# Altium PCB PCB2.PcbDoc (part 2 of 2)
Units mm, origin at the board's own origin, x right, y up, seen from the top; angles counter-clockwise.
Board outline 100 x 150 mm, 2 copper layers (Top Layer, Bottom Layer), stack 1.569 mm thick; 187 components, 138 nets, 678 pads, 337 vias.
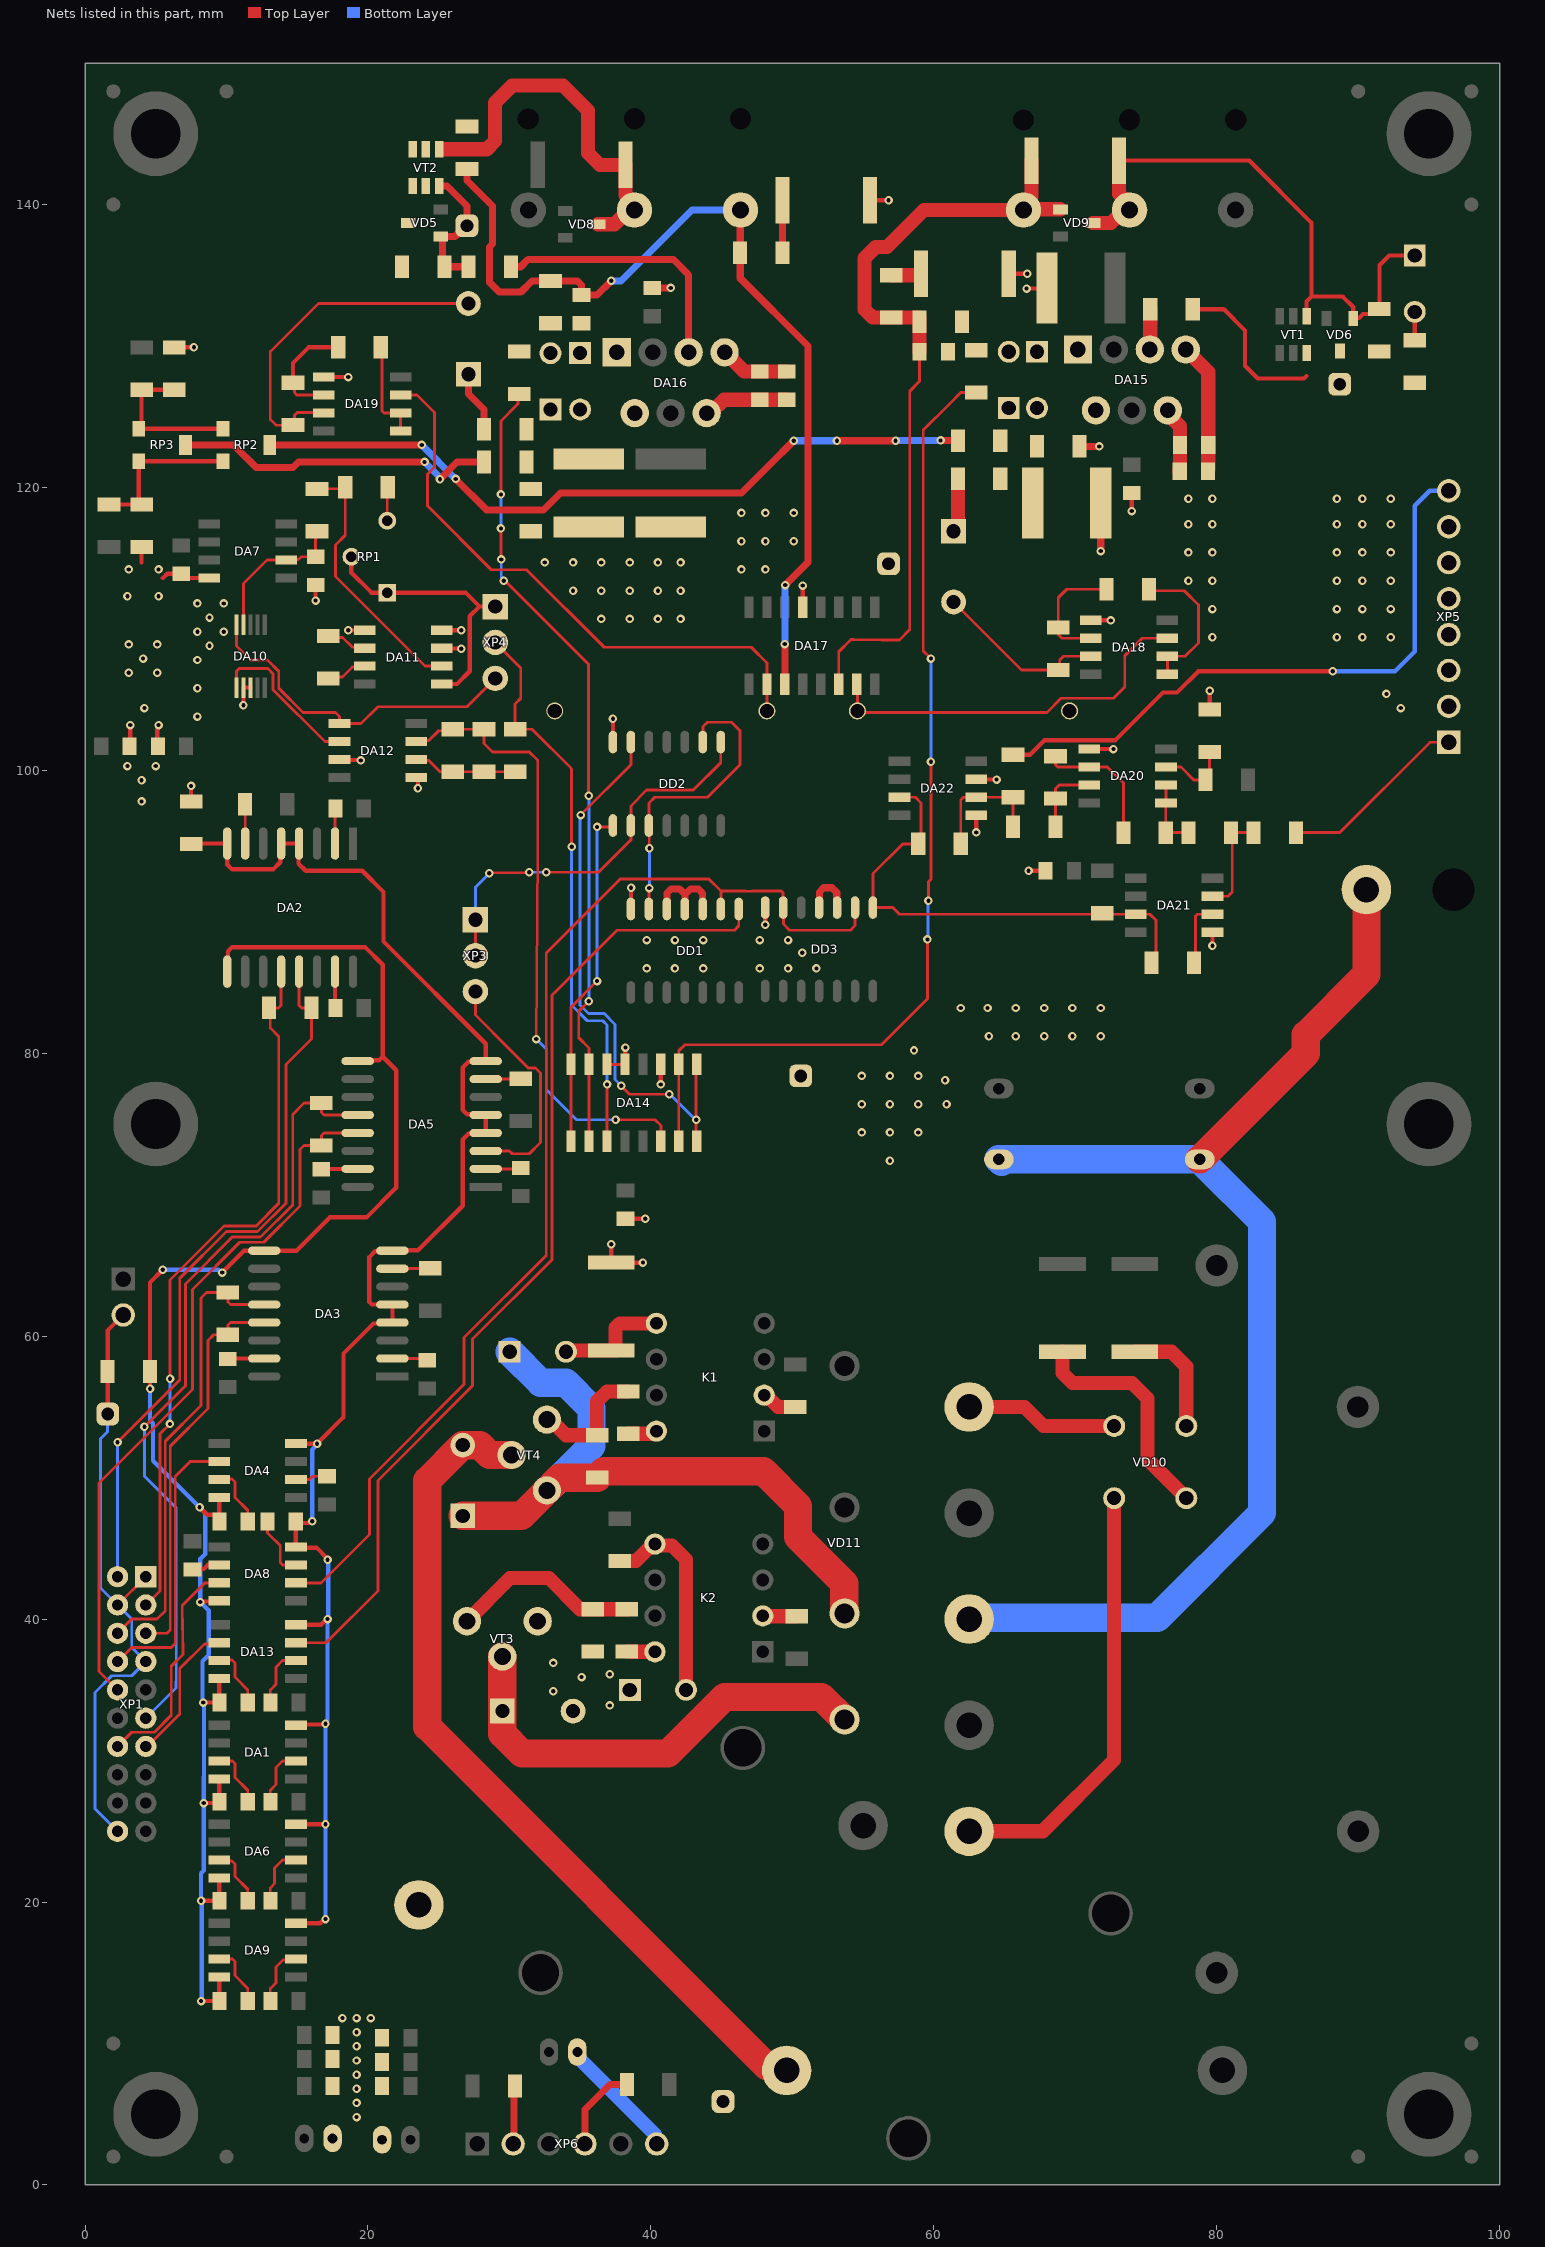
[diagram p2: the nets of this part, all layers, seen from the top]

## Via types
v1: diameter 0.6, hole 0.3, Top Layer to Bottom Layer, 337 vias

## Nets (pads, with @x,y where several pads share a name; then routed paths per layer and width w, separated by ;. In a path a pad name is that pad's centre, name@x,y a point inside that pad or via, vN(x,y) a via of type N, cw(c..) or ccw(c..) an arc to the next point about the centre after c; other vN are vias at no path point) (continued)
GND: C13.2 C16.1 C22.1 C23.1 C26.1 C29.2 C30.1 C31.2 C34.1 C35.1 C38.2 C39.2 C40.1 C41.1 C42.2 C43.2 C44.2 C45.1 C46.2 C47.1 C48.1 C49.2 C50.1 C51.2 C54.2 DA7.4 DA10.2 DA10.3 DA11.3 DA11.4 DA11.5 DA12.3 DA12.5 DA14.3 DA14.5 DA14.6 DA17.5 DA18.5 DA19.5 DA20.5 DA21.1 DA22.1 DA22.3 DD1.7 DD2.7 DD3.7 pad.4 pad.10 R8.2 R15.1 R16.2 R20.1 R23.1 R41.2 R42.2 R49.1 R59.1 XP5.2 XP5.3 XP5.4 XP5.5 XP5.6 XP5.7 XP6.6 КТ2.1 КТ5.1 КТ6.1 | length 154.2
  Top Layer w0.2: DA14.6@36.895,79.212 DA14.5@38.165,79.212
  Top Layer w0.3: C44.2@3.15,101.7 3.2,101.75 v1(3.2,103.2) ; 4,114.7 R16.2@4,115.8 ; C43.2@5.1,101.7 5.1,103.019 5.2,103.119 v1(5.2,103.2) ; 5.5,113.6 5.514,113.6 5.814,113.9 C13.2@6.8,113.9 7.105,113.595 DA7.4@8.788,113.595 ; R15.1@6.3,129.9 v1(7.7,129.9) ; R8.2@7.5,97.8 v1(7.5,98.9) ; v1(11.2,104.6) DA10.2@11.2,105.85 DA10.3@11.7,105.85 ; v1(16.3,112) C16.1@16.3,113.1 ; DA19.5@16.888,127.805 16.89,127.803 18.598,127.803 v1(18.6,127.8) ; DA12.3@17.988,100.765 18.02,100.732 19.467,100.732 v1(19.5,100.7) ; v1(18.6,109.9) 18.603,109.903 19.785,109.903 DA11.5@19.788,109.905 ; DA12.5@23.412,99.495 23.537,99.32 v1(23.537,98.737) ; DA11.3@25.212,108.635 25.229,108.617 26.583,108.617 v1(26.6,108.6) ; DA11.4@25.212,109.905 25.214,109.903 26.598,109.903 v1(26.6,109.9) ; R59.1@37.2,65.2 39.443,65.2 v1(39.443,65.203) ; R59.1@37.2,65.275 v1(37.2,66.498) ; DD2.7@37.32,102 v1(37.32,103.65) ; DA14.5@38.165,79.212 38.183,79.23 38.183,80.383 v1(38.2,80.4) ; C48.1@38.2,68.3 v1(39.6,68.3) ; DD1.7@38.59,90.2 38.595,90.205 38.595,91.695 v1(38.6,91.7) ; v1(40.7,77.8) 40.703,77.803 40.703,79.21 DA14.3@40.705,79.212 ; v1(48.08,89.077) DD3.7@48.08,90.3 ; v1(50.73,113.058) 50.735,113.053 50.735,111.529 DA17.5@50.74,111.524 ; R42.2@55.575,140.3 v1(56.798,140.3) ; v1(63,95.607) DA22.1@63,96.83 ; DA22.3@63,99.37 63.012,99.358 64.422,99.358 v1(64.434,99.345) ; R41.2@65.375,135.1 v1(66.598,135.1) ; v1(66.557,134.056) 67.956,134.056 C30.1@68,134.1 ; v1(66.7,92.9) C54.2@67.85,92.9 ; DA20.5@70.988,101.505 70.991,101.502 72.698,101.502 v1(72.7,101.5) ; DA18.5@71.088,110.605 71.091,110.602 72.498,110.602 v1(72.5,110.6) ; v1(74,118.327) C31.2@74,119.55 ; R49.1@79.5,104.4 v1(79.5,105.623) ; v1(79.7,87.6) DA21.1@79.7,88.56
  Top Layer w0.5: C26.1@40,134.1 C26.1@40.1,134.1 v1(41.4,134.1) ; R20.1@70.3,122.9 v1(71.7,122.9) ; v1(71.8,115.5) C22.1@71.8,118.9
  Top Layer w2: C41.1@78.8,72.5 86.3,80 86.3,81.3 90.585,85.585 pad.4@90.585,91.568
  Bottom Layer w1: C39.2@34.8,9.4 34.8,9.075 40.296,3.579 40.296,3.024 XP6.6@40.42,2.9
  Bottom Layer w2: pad.10@62.5,40 62.6,40.1 75.8,40.1 83.2,47.5 83.2,68.1 79.227,72.073 79.227,72.315 79.042,72.5 C41.1@78.8,72.5 C42.2@64.615,72.5 ; C42.2@64.6,72.5 C42.2@64.615,72.5 ; C42.2@64.8,72.315 C42.2@64.615,72.5
  other v1: 19.2,4.8 19.2,5.8 19.2,6.8 19.2,7.8 19.2,8.8 19.2,9.8 19.2,10.8 18.2,11.8 19.2,11.8 20.2,11.8 56.9,72.4 54.9,74.4 56.9,74.4 58.9,74.4 54.9,76.4 56.9,76.4 58.9,76.4 60.9,76.4 60.8,78.1 54.9,78.4 56.9,78.4 58.9,78.4 58.6,80.2 63.9,81.2 65.8,81.2 67.8,81.2 69.8,81.2 71.8,81.2 61.9,83.2 63.8,83.2 65.8,83.2 67.8,83.2 69.8,83.2 71.8,83.2 39.7,86 41.7,86 43.7,86 47.7,86 49.7,86 51.7,86 50.7,87.1 39.7,88 41.7,88 43.7,88 47.7,88 49.7,88 4,97.8 4,99.3 3,100.3 5,100.3 7.95,103.8 4.2,104.4 93,104.4 92,105.4 7.95,105.8 3.1,106.9 5.1,106.9 7.95,107.8 4.1,107.9 8.8,108.8 3.1,108.9 5.1,108.9 79.7,109.4 88.5,109.4 90.3,109.4 92.3,109.4 7.95,109.8 9.8,109.8 36.5,110.7 38.5,110.7 40.5,110.7 42.1,110.7 8.8,110.8 79.7,111.4 88.5,111.4 90.3,111.4 92.3,111.4 7.95,111.8 9.8,111.8 3,112.3 5.2,112.3 34.5,112.7 36.5,112.7 38.5,112.7 40.5,112.7 42.1,112.7 78,113.4 79.7,113.4 88.5,113.4 90.3,113.4 92.3,113.4 3.1,114.2 5.2,114.2 46.4,114.2 48.1,114.2 32.5,114.7 34.5,114.7 36.5,114.7 38.5,114.7 40.5,114.7 42.1,114.7 78,115.4 79.7,115.4 88.5,115.4 90.3,115.4 92.3,115.4 46.4,116.2 48.1,116.2 50.1,116.2 78,117.4 79.7,117.4 88.5,117.4 90.3,117.4 92.3,117.4 46.4,118.2 48.1,118.2 50.1,118.2 78,119.2 79.7,119.2 88.5,119.2 90.3,119.2 92.3,119.2
GNDN: C1.1 C5.1 C7.1 C15.1 C19.1 DA1.4 DA2.9 DA3.9 DA4.4 DA5.9 DA6.4 DA8.8 DA9.4 DA13.4 R1.1 | length 120.9
  Top Layer w0.3: v1(4.6,56.277) R1.1@4.6,57.5 4.6,63.8 v1(5.5,64.7) ; v1(8.1,47.9) 8.111,47.9 8.636,47.375 9.15,47.375 C5.1@9.488,47.037 ; v1(8.15,41.208) 8.194,41.251 9.444,41.251 DA8.8@9.488,41.295 ; v1(8.2,13) 9.476,13 9.488,13.012 DA9.4@9.488,14.695 DA9.4@9.476,14.707 ; v1(8.2,20.1) C7.1@9.5,20.1 9.488,20.112 DA6.4@9.488,21.695 ; v1(8.35,34.1) 9.476,34.1 9.488,34.112 DA13.4@9.488,35.795 ; v1(8.4,27) 9.4,27 C1.1@9.5,27.1 9.488,27.112 DA1.4@9.488,28.695 ; DA4.4@9.476,48.607 DA4.4@9.488,48.595 C5.1@9.488,46.912 ; v1(9.7,64.5) 11.245,66.045 DA3.9@12.672,66.045 14.945,66.045 17.3,68.4 19.9,68.4 22,70.5 22,78.8 21.047,79.753 ; DA2.9@10.055,85.772 10.109,85.826 10.109,87.209 10.4,87.5 19.8,87.5 21.047,86.253 21.047,79.753 ; DA5.9@19.259,79.458 19.299,79.499 20.793,79.499 21.047,79.753
  Bottom Layer w0.3: v1(4.6,56.277) 4.6,54.049 4.8,53.849 4.8,51.2 8.5,47.5 8.5,44.612 8.15,44.262 v1(8.15,41.208) 8.75,40.608 8.75,37.475 8.3,37.025 8.3,34.15 v1(8.35,34.1) ; v1(5.5,64.7) 9.419,64.7 9.619,64.5 v1(9.7,64.5) ; v1(8.2,13) 8.244,13.044 8.244,20.056 v1(8.2,20.1) 8.2,22.035 8.4,22.235 v1(8.4,27) 8.4,28.857 8.407,28.864 8.407,33.993 v1@8.325,34.075
GNDR: C17.1 DA1.8 DA2.4 DA2.5 DA2.8 DA3.4 DA3.5 DA3.8 DA4.8 DA5.4 DA5.5 DA5.8 DA6.8 DA8.4 DA9.8 DA13.8 R8.1 | length 121.5
  Top Layer w0.3: R8.1@7.5,94.8 7.528,94.828 DA2.8@10.055,94.828 10.055,93.345 10.4,93 13.3,93 13.8,93.5 13.8,94.763 DA2.5@13.865,94.828 DA2.4@15.135,94.828 15.1,94.793 15.1,93.4 15.6,92.9 19.6,92.9 21.1,91.4 21.1,87.896 28.328,80.668 DA5.8@28.328,79.445 28.283,79.4 27.1,79.4 26.7,79 26.7,76 27.011,75.689 28.274,75.689 DA5.5@28.328,75.635 DA5.4@28.328,74.365 28.274,74.311 27.111,74.311 26.7,73.9 26.7,69.223 23.547,66.07 21.753,66.07 DA3.8@21.728,66.045 21.683,66 20.5,66 20.1,65.6 20.1,62.411 20.276,62.235 DA3.5@21.728,62.235 DA3.4@21.728,60.965 21.663,60.9 20.4,60.9 18.279,58.779 18.279,54.279 v1(16.4,52.4) 16.397,52.403 14.915,52.403 DA4.8@14.912,52.405 ; DA9.8@14.912,18.505 16.624,18.505 16.919,18.8 v1(17,18.8) ; DA6.8@14.912,25.505 14.915,25.502 16.997,25.502 v1(17,25.5) ; DA1.8@14.912,32.505 14.96,32.553 16.952,32.553 v1(17,32.6) ; DA13.8@14.912,39.605 16.674,39.605 17.069,40 v1(17.15,40) ; v1(16.061,46.916) 15.98,46.916 15.864,46.8 15,46.8 C17.1@14.9,46.9 14.9,45.117 14.966,45.051 16.368,45.051 17.15,44.269 v1(17.15,44.2)
  Bottom Layer w0.3: v1(16.061,46.916) 16.061,51.98 16.4,52.319 v1(16.4,52.4) ; v1(17,18.8) v1(17,25.5) 17,32.681 17.15,32.831 17.15,39.861 17.289,40 17.2,40.089 17.2,44.15 v1(17.15,44.2) ; v1(17.15,40) v1@17.3,40
IMPc: DA5.3 XP3.3 | length 17.1
  Top Layer w0.2: XP3.3@27.6,84.36 27.6,82.783 27.6,82.7 29.989,80.295 ; DA5.3@28.328,73.095 30.005,73.095 30.2,72.9 31.4,72.9 32.2,73.7 32.2,78.6 31.846,78.954 31.331,78.954 29.992,80.292
LIMIT: DA13.7 DD1.1 | length 70.9
  Top Layer w0.2: DA13.7@14.912,38.335 17.035,38.335 20.7,42 20.7,49.8 27.4,56.5 27.4,59.8 33,65.4 33,84.1 37.6,88.7 45.9,88.7 46.21,89.01 DD1.1@46.21,90.2
LIMITn: DA13.2 XP1.13 | length 10
  Top Layer w0.2: XP1.13@4.3,31 4.4,31 6.7,33.3 6.7,36.5 8.435,38.235 DA13.2@9.388,38.235
LM+: R52.1 XP5.1 | length 13.4
  Top Layer w0.2: R52.1@85.6,95.6 88.7,95.6 95.08,101.98 XP5.1@96.4,101.98
LM-: R54.2 XP5.8 | length 44.4
  Top Layer w0.3: R54.2@65.6,101.1 66.8,101.1 67.83,102.13 72.83,102.13 ; 72.918,102.218 73.05,102.35 76.2,105.5 77.2,105.5 78.7,107 v1(88.2,107)
  Bottom Layer w0.3: v1(88.2,107) 92.6,107 94,108.4 94,118.7 95.06,119.76 XP5.8@96.4,119.76
Net2: pad.2 R38.2 R43.2 VD6.1 VD7.1 VD9.3 VT1.4 | length 41
  Top Layer w0.3: R43.2@73.1,143.1 82.3,143.1 86.7,138.7 86.7,133.5 ; VT1.4@86.35,132.1 86.35,133.15 86.7,133.5 ; VD7.1@94,136.39 92.19,136.39 91.5,135.7 R38.2@91.5,132.6 91.15,132.25 90.348,132.25 90.078,131.981 89.681,131.981 VD6.1@89.65,131.95 89.65,132.75 88.9,133.5 86.7,133.5
  Top Layer w1: VD9.3@71.25,138.7 72.527,138.7 73.433,139.606 pad.2@73.839,139.606 73.839,140.012 73.1,140.75 R43.2@73.1,143.1
Net3: C24.2 C36.2 DA17.14 pad.3 R26.2 R43.1 VD9.1 | length 57.1
  Top Layer w0.2: DA17.14@53.28,106.1 53.28,108.38 54.141,109.241 54.307,109.241 56.325,109.211 57.566,109.211 58.3,109.945 58.3,126.8 59,127.5 C24.2@59,129.6
  Top Layer w1: C24.2@59,129.6 R26.2@59,131.7 59,132 C36.2@57,132 55.686,132 55.1,132.586 55.1,136.2 55.9,137 56.7,137 59.306,139.606 pad.3@66.338,139.606 ; R43.1@66.9,143.1 66.9,140.574 66.338,140.012 pad.3@66.338,139.606 ; VD9.1@68.95,139.65 68.938,139.662 66.395,139.662 pad.3@66.338,139.606
Net5: C25.2 C37.2 DA17.11 pad.5 R27.2 R39.2 | length 66.7
  Top Layer w0.5: R39.2@27,142.5 27,141.7 28.8,139.9 28.8,137.2 28.6,137 28.6,134.5 29.3,133.8 30.8,133.8 31.6,134.6 R27.2@32.9,134.6 34.8,134.6 35.1,134.3 C25.2@35.1,133.6 36.2,133.6 v1(37.2,134.6) ; pad.5@46.339,139.606 46.319,139.587 46.319,134.781 51.105,129.995 51.105,114.705 v1(49.5,113.1) ; DA17.11@49.47,106.1 v1(49.47,108.93)
  Bottom Layer w0.5: v1(37.2,134.6) 37.9,134.6 42.906,139.606 pad.5@46.339,139.606 ; v1(49.47,108.93) 49.485,108.945 49.485,113.085 v1(49.5,113.1)
Net6: pad.6 R40.2 VD8.3 VT2.4 | length 26.9
  Top Layer w1: VT2.4@25.25,143.9 28.402,143.9 28.987,144.486 28.987,147.187 30.2,148.4 33.8,148.4 35.55,146.65 35.55,143.65 36.4,142.8 R40.2@38.2,142.8 38.2,140.65 38.838,140.012 pad.6@38.838,139.606 38.432,139.606 37.426,138.6 VD8.3@36.25,138.6
Net8: pad.8 VD10.1 | length 10.8
  Top Layer w1: pad.8@62.5,55 66.4,55 67.75,53.65 VD10.1@72.75,53.65
Net12: pad.12@62.5,25 VD10.2 | length 30.8
  Top Layer w1: pad.12@62.5,25 67.7,25 72.75,30.05 VD10.2@72.75,48.55
NetC1_2: C1.2 DA1.3 | length 4.3
  Top Layer w0.2: DA1.3@9.488,29.965 10.435,29.965 10.6,29.8 10.6,28.8 11.5,27.9 C1.2@11.5,27.1
NetC2_2: C2.2 DA1.6 | length 4.2
  Top Layer w0.2: C2.2@13.1,27.1 13.1,27.9 13.5,28.3 13.5,29.5 13.965,29.965 DA1.6@14.912,29.965
NetC3_1: C3.1 DA2.15 | length 2.6
  Top Layer w0.3: DA2.15@17.675,85.772 17.675,83.225 C3.1@17.7,83.2
NetC4_1: C4.1 DA3.15 | length 2.6
  Top Layer w0.3: C4.1@10.1,58.4 10.125,58.425 DA3.15@12.672,58.425
NetC5_2: C5.2 DA4.3 | length 4.4
  Top Layer w0.2: DA4.3@9.488,49.865 9.523,49.9 10.4,49.9 10.6,49.7 10.6,48.6 11.5,47.7 C5.2@11.5,46.9
NetC6_1: C6.1 DA5.15 | length 2.6
  Top Layer w0.3: C6.1@16.7,71.8 16.725,71.825 DA5.15@19.272,71.825
NetC7_2: C7.2 DA6.3 | length 4.2
  Top Layer w0.2: DA6.3@9.488,22.965 9.553,22.9 10.4,22.9 10.6,22.7 10.6,21.8 11.5,20.9 C7.2@11.5,20.1
NetC8_2: C8.2 DA4.6 | length 2.3
  Top Layer w0.2: DA4.6@14.912,49.865 15.865,49.865 16.1,50.1 C8.2@17.1,50.1
NetC9_1: C9.1 DA2.2 | length 2.5
  Top Layer w0.2: DA2.2@17.675,94.828 17.675,97.275 C9.1@17.7,97.3
NetC10_1: C10.1 DA3.2 | length 2.5
  Top Layer w0.2: DA3.2@21.728,58.425 24.075,58.425 C10.1@24.2,58.3
NetC11_1: C11.1 DA5.2 | length 2.6
  Top Layer w0.2: DA5.2@28.328,71.825 30.575,71.825 C11.1@30.8,71.6
NetC12_2: C12.2 DA6.6 | length 4.2
  Top Layer w0.2: C12.2@13.1,20.1 13.1,21 13.4,21.3 13.4,22.4 13.965,22.965 DA6.6@14.912,22.965
NetC14_2: C14.2 DA8.6 | length 2.1
  Top Layer w0.3: C14.2@7.6,43.44 7.7,43.54 8.4,43.54 8.7,43.84 9.483,43.84 DA8.6@9.488,43.835
NetC15_2: C15.2 DA9.3 | length 4.4
  Top Layer w0.2: DA9.3@9.488,15.965 10.435,15.965 10.6,15.8 10.6,14.8 11.5,13.9 C15.2@11.5,13
NetC16_2: C16.2 DA7.6 DA10.9 R9.1 | length 10.7
  Top Layer w0.2: DA10.9@11.2,110.3 11.2,113.2 12.865,114.865 DA7.6@14.212,114.865 14.247,114.9 15.1,114.9 15.3,115.1 C16.2@16.3,115.1 16.3,116.8 R9.1@16.4,116.9 ; DA7.6@14.665,114.865 DA7.6@14.7,114.9
NetC17_2: C17.2 DA8.3 | length 4.5
  Top Layer w0.2: C17.2@12.9,46.9 12.9,46.1 13.8,45.2 13.8,44 13.965,43.835 DA8.3@14.912,43.835
NetC18_2: C18.2 DA9.6 | length 4.2
  Top Layer w0.2: C18.2@13.1,13 13.1,13.9 13.5,14.3 13.5,15.4 14,15.9 14.847,15.9 DA9.6@14.912,15.965
NetC19_2: C19.2 DA13.3 | length 4.4
  Top Layer w0.2: DA13.3@9.488,37.065 9.523,37.1 10.4,37.1 10.6,36.9 10.6,35.9 11.5,35 C19.2@11.5,34.1
NetC20_2: C20.2 DA13.6 | length 4.3
  Top Layer w0.2: C20.2@13.1,34.1 13.1,35 13.5,35.4 13.5,36.6 13.965,37.065 DA13.6@14.912,37.065
NetC21_1: C21.1 DA12.6 R11.2 R12.1 | length 7.3
  Top Layer w0.2: DA12.6@23.412,100.765 23.477,100.7 24.3,100.7 25.099,99.901 R12.1@26,99.9 ; R12.1@26,99.9 C21.1@28.2,99.9 R11.2@30.4,99.9
NetC21_2: C21.2 DA12.7 DA14.14 R12.2 | length 44.3
  Top Layer w0.2: DA12.7@23.412,102.035 23.477,102.1 24.3,102.1 25,102.8 25.9,102.8 R12.2@26,102.9 C21.2@28.2,102.9 28.2,101.9 28.8,101.3 31.4,101.3 31.941,100.759 32,100.7 32,94.2 cw(c31.1,94.2) 32,94.193 v1(31.9,81) ; v1(37.5,75.3) 40.301,75.3 40.705,74.896 DA14.14@40.705,73.788
  Bottom Layer w0.2: v1(31.9,81) 32.6,80.3 32.6,80.23 32.604,80.226 32.604,79.481 32.6,79.477 32.6,77.45 34.75,75.3 v1(37.5,75.3)
NetC22_2: C22.2 DA15.2 R20.2 R21.2 R24.1 VD1.1 VD3.2
NetC23_2: C23.2 DA16.2 R22.2 R23.2 R25.1 VD2.1 VD4.2
NetC24_1: C24.1 DA15.1 R18.2 R26.1 VD1.2 VD3.1
NetC25_1: C25.1 DA16.1 R19.2 R27.1 VD2.2 VD4.1
NetC27_1: C27.1 C32.1 DA15.7 | length 9.3
  Top Layer w1: DA15.7@77.81,129.75 79.4,128.16 C27.1@79.4,123 79.4,121.268 79.39,121.258 C32.1@79.39,121.133
NetC27_2: C27.2 C32.2 DA15.6 | length 4.9
  Top Layer w1: DA15.6@76.731,125.641 DA15.6@76.54,125.45 76.54,125.179 77.4,124.319 C27.2@77.4,123 77.4,121.268 77.39,121.258 C32.2@77.39,121.133
NetC28_1: C28.1 C33.1 DA16.7 | length 4.9
  Top Layer w1: DA16.7@45.21,129.55 45.25,129.55 46.6,128.2 C28.1@47.7,128.2 C33.1@49.6,128.2
NetC28_2: C28.2 C33.2 DA16.6 | length 6.1
  Top Layer w1: DA16.6@43.94,125.25 44.211,125.25 45.161,126.2 C28.2@47.7,126.2 C33.2@49.6,126.2
NetC34_2: C34.2 DA17.15 DA18.3 | length 27.4
  Top Layer w0.2: DA17.15@54.55,106.1 54.6,106.05 54.6,104.1 68,104.1 69,105.1 72.7,105.1 73.5,105.9 73.5,108.1 74.735,109.335 DA18.3@76.512,109.335
NetC35_2: C35.2 DA17.10 DA19.3 | length 41.7
  Top Layer w0.2: DA19.3@22.312,126.535 23.465,126.535 24.7,125.3 24.7,121.431 24.2,120.931 24.2,118.7 28.716,114.184 31.216,114.184 36.7,108.7 47.1,108.7 48.2,107.6 DA17.10@48.2,106.1 C35.2@48.2,104.2
NetC36_1: C36.1 R41.1 | length 2.2
  Top Layer w1: C36.1@57,135 59.1,135 R41.1@59.1,135.1
NetC37_1: C37.1 R42.1 | length 3.7
  Top Layer w0.5: C37.1@49.3,136.6 R42.1@49.3,140.3
NetC52_1: C52.1 C53.2 DA21.7 DA22.7 DD3.1 R60.1 | length 34.6
  Top Layer w0.2: DA22.7@57.576,98.1 58.7,98.1 59.1,97.7 59.1,95 C53.2@58.9,94.8 57.8,94.8 55.7,92.7 DD3.1@55.7,90.3 57.1,90.3 57.57,89.83 DA21.7@74.276,89.83 75.27,89.83 75.7,89.4 75.7,86.7 C52.1@75.4,86.4
NetC52_2: C52.2 DA21.2 | length 4.6
  Top Layer w0.2: C52.2@78.4,86.4 78.5,86.5 78.5,89.7 78.63,89.83 DA21.2@79.7,89.83
NetC53_1: C53.1 DA22.2 R54.1 R57.1 | length 9
  Top Layer w0.2: C53.1@61.9,94.8 61.9,97.9 62.1,98.1 DA22.2@63,98.1 R54.1@65.6,98.1 R57.1@65.6,96
NetDA2_7: DA2.7 R5.2 | length 2.8
  Top Layer w0.2: R5.2@11.3,97.6 11.325,97.575 DA2.7@11.325,94.828
NetDA2_12: DA2.12 R2.1 XP1.3 | length 51
  Top Layer w0.2: XP1.3@4.3,41 5.3,42 5.3,53.1 v1(6,53.8) ; v1(6.011,56.989) 6.011,63.983 9.828,67.8 12.1,67.8 13.7,69.4 13.7,81.19 13.1,81.79 13.1,83.117 R2.1@13.008,83.208 13.1,83.208 13.683,83.208 13.865,83.39 DA2.12@13.865,85.772
  Bottom Layer w0.2: v1(6,53.8) v1@6,56.978
NetDA2_13: DA2.13 R2.2 XP1.2 | length 50.5
  Top Layer w0.2: v1(2.3,52.5) 6.7,56.9 6.7,64.1 9.995,67.395 12.195,67.395 14.2,69.4 14.2,79.2 16.008,81.008 R2.2@16.008,83.208 ; DA2.13@15.135,85.772 15.135,83.39 15.317,83.208 R2.2@15.992,83.208
  Bottom Layer w0.2: XP1.2@2.3,43 v1(2.3,52.5)
NetDA3_7: DA3.7 R6.2 | length 2.7
  Top Layer w0.2: DA3.7@21.728,64.775 24.375,64.775 R6.2@24.4,64.8
NetDA3_12: DA3.12 R3.1 XP1.6 | length 32.6
  Top Layer w0.2: XP1.6@2.3,39 3.3,40 3.9,40 4.714,40 5.1,40 5.675,40.575 5.675,52.575 8.2,55.1 8.2,62.7 8.6,63.1 R3.1@10.1,63.1 ; R3.1@10.108,63.092 10.108,62.417 10.29,62.235 DA3.12@12.672,62.235
NetDA3_13: DA3.13 R3.2 XP1.5 | length 28.3
  Top Layer w0.2: XP1.5@4.3,39 5.8,39 6.025,39.225 6.025,52.225 8.7,54.9 8.7,59.7 9.1,60.1 R3.2@10.1,60.1 ; R3.2@10.108,60.108 10.108,60.783 10.29,60.965 DA3.13@12.672,60.965
NetDA4_2: DA4.2 XP1.8 | length 19.6
  Top Layer w0.2: XP1.8@2.3,37 3.3,38 6.1,38 6.375,38.275 6.375,50.075 7.435,51.135 DA4.2@9.088,51.135
NetDA5_7: DA5.7 R7.2 | length 2.8
  Top Layer w0.2: DA5.7@28.328,78.175 31.075,78.175 R7.2@31.1,78.2
NetDA5_12: DA5.12 R4.1 XP1.11 | length 55.7
  Top Layer w0.2: v1(4.2,53.6) 7.1,56.5 7.1,63.7 10.409,67.009 12.409,67.009 14.681,69.281 14.681,75.681 15.492,76.492 R4.1@16.708,76.492 16.708,75.817 16.89,75.635 DA5.12@19.272,75.635
  Bottom Layer w0.2: v1(4.2,53.6) 4.2,50.1 6.45,47.85 6.45,41.67 6.444,41.664 6.444,41.18 6.444,41.155 cw(c4.3,41) 6.444,40.845 6.444,40.504 6.45,39.311 6.45,36.089 6.441,35.141 XP1.11@4.3,33
NetDA5_13: DA5.13 R4.2 XP1.10 | length 50.6
  Top Layer w0.2: XP1.10@2.3,35 1,36.3 1,49.622 7.6,56.222 7.6,63.3 10.937,66.637 12.637,66.637 15.2,69.2 15.2,73.2 15.492,73.492 R4.2@16.708,73.492 ; R4.2@16.708,73.508 16.708,74.183 16.89,74.365 DA5.13@19.272,74.365
NetDA10_1: DA10.1 DA12.2 | length 11.3
  Top Layer w0.2: DA10.1@10.7,105.85 10.7,107 10.9,107.2 12.925,107.2 13.3,106.825 13.3,105.7 16.965,102.035 DA12.2@17.988,102.035
NetDA10_10: DA10.10 DA12.1 XP4.3 | length 24.4
  Top Layer w0.2: DA10.10@10.7,110.3 10.7,108.8 11.7,107.8 12.9,107.8 13.7,107 13.7,105.8 15.4,104.1 17.7,104.1 18,103.8 18,103.317 DA12.1@17.988,103.305 19.505,103.305 20.7,104.5 27,104.5 XP4.3@29,106.5
NetDA11_1: DA11.1 RP1.1 RP1.2 XP4.1 | length 19.5
  Top Layer w0.3: RP1.2@18.825,115.1 18.825,113.975 20.24,112.56 RP1.1@21.365,112.56 26.9,112.56 27.88,111.58 ; DA11.1@25.212,106.095 26.295,106.095 27.2,107 27.2,110.9 27.88,111.58 ; XP4.1@29,111.58 27.88,111.58
NetDA11_2: DA11.2 R9.2 R10.1 | length 18.8
  Top Layer w0.2: R9.2@16.4,119.9 18.3,119.9 R10.1@18.4,120 18.4,116.62 17.7,115.92 17.7,113.7 24.035,107.365 DA11.2@25.212,107.365
NetDA11_6: DA11.6 R13.1 | length 2.9
  Top Layer w0.2: R13.1@17.2,109.5 17.3,109.4 18.2,109.4 18.9,108.7 19.723,108.7 DA11.6@19.788,108.635
NetDA11_7: DA11.7 R13.2 | length 2.9
  Top Layer w0.2: R13.2@17.2,106.5 17.3,106.6 18.2,106.6 18.896,107.296 19.719,107.296 DA11.7@19.788,107.365
NetDA14_1: DA14.1 DA14.16 DD2.6 | length 39.4
  Top Layer w0.2: v1(35.034,96.834) 38.59,100.39 DD2.6@38.59,102 ; v1(37.9,77.7) 38.5,77.1 v1(41.3,77.1) ; DA14.16@43.245,73.788 43.2,73.833 43.2,79.167 DA14.1@43.245,79.212
  Bottom Layer w0.2: v1(35.034,96.834) 35,96.8 35,83.4 35.6,82.8 36.7,82.8 37.456,82.044 37.456,78.144 v1(37.9,77.7) ; v1(41.3,77.1) 41.35,77.1 43.15,75.3 v1(43.2,75.3)
NetDA14_8: DA14.8 DA14.9 DD2.8 | length 24.1
  Top Layer w0.2: DA14.9@34.355,73.788 DA14.8@34.355,79.212 34.355,83.255 v1(36.2,85.1) ; v1(36.2,96) 37.22,96 DD2.8@37.32,96.1
  Bottom Layer w0.2: v1(36.2,85.1) v1(36.2,96)
NetDA14_11: DA14.11 R11.1 XP4.2 | length 40.2
  Top Layer w0.2: XP4.2@29,109.04 30.8,107.24 30.8,105.1 30.4,104.7 R11.1@30.4,102.9 31.6,102.9 34.341,100.159 34.4,100.1 v1(34.4,94.6) ; DA14.11@36.895,73.788 36.9,73.793 v1(36.9,77.8)
  Bottom Layer w0.2: v1(34.4,94.6) 34.4,83.4 35.5,82.3 36.6,82.3 36.9,82 v1(36.9,77.8)
NetDA15_5: DA15.5 R30.1 | length 2.8
  Top Layer w1: DA15.5@75.3,129.78 R30.1@75.3,132.6
NetDA16_5: DA16.5 R31.1 | length 18.7
  Top Layer w0.5: R31.1@30.1,135.6 30.8,135.6 31.3,136.1 41.6,136.1 42.67,135.03 DA16.5@42.67,129.55
NetDA18_1: DA18.1 DA18.2 R32.1 | length 10.5
  Top Layer w0.2: R32.1@75.2,112.8 75.3,112.7 77.7,112.7 78.7,111.7 78.7,109 77.765,108.065 DA18.2@76.512,108.065 DA18.1@76.512,106.795
NetDA18_6: DA18.6 R32.2 R34.1 | length 8.6
  Top Layer w0.2: DA18.6@71.088,109.335 69.065,109.335 68.8,109.6 R34.1@68.8,110.1 68.8,112.2 69.4,112.8 R32.2@72.2,112.8
NetDA18_7: DA18.7 R28.2 R34.2 | length 12.4
  Top Layer w0.2: R28.2@61.4,111.9 66.2,107.1 R34.2@68.8,107.1 68.9,107.2 68.9,107.8 69.165,108.065 DA18.7@71.088,108.065
NetDA19_1: DA19.1 DA19.2 R33.1 | length 7.2
  Top Layer w0.2: R33.1@21.1,129.9 21,129.8 21,125.4 21.135,125.265 DA19.2@22.312,125.265 DA19.1@22.312,123.995
NetDA19_6: DA19.6 R33.2 R35.1 | length 8.2
  Top Layer w0.2: R35.1@14.7,127.4 14.8,127.3 14.8,126.7 14.965,126.535 DA19.6@16.888,126.535
  Top Layer w0.3: R35.1@14.7,127.4 14.7,128.8 15.8,129.9 R33.2@18.1,129.9
NetDA19_7: DA19.7 R29.2 R35.2 | length 24.9
  Top Layer w0.2: DA19.7@16.888,125.265 16.853,125.3 15,125.3 14.8,125.1 14.8,124.5 R35.2@14.7,124.4 13.5,124.4 13.1,124.8 13.1,129.6 16.5,133 R29.2@27.1,133
NetDA20_1: DA20.1 DA20.2 R50.1 R53.1 | length 5
  Top Layer w0.2: DA20.2@76.412,98.965 DA20.1@76.412,97.695 76.4,97.683 R50.1@76.4,95.6 R53.1@78,95.6
NetDA20_3: DA20.3 R48.1 R49.2 | length 5.3
  Top Layer w0.2: DA20.3@76.412,100.235 77.465,100.235 78.375,99.325 R48.1@79.2,99.325 79.5,99.625 R49.2@79.5,101.3
NetDA20_6: DA20.6 R50.2 R51.1 | length 9.4
  Top Layer w0.2: R51.1@68.6,101 68.6,100.4 68.765,100.235 DA20.6@70.988,100.235 72.265,100.235 73.4,99.1 R50.2@73.4,95.6
NetDA20_7: DA20.7 R51.2 R57.2 | length 5.2
  Top Layer w0.2: R57.2@68.6,96 R51.2@68.6,98 68.6,98.7 68.865,98.965 DA20.7@70.988,98.965
NetDA21_3: DA21.3 R52.2 R53.2 | length 7.4
  Top Layer w0.2: DA21.3@79.7,91.1 80.8,91.1 81.1,91.4 81.1,95.5 R53.2@81,95.6 R52.2@82.6,95.6
NetDD1_3: DD1.3 DD1.4 DD1.5 | length 6.3
  Top Layer w0.5: DD1.5@41.13,90.2 41.149,90.219 41.149,91.326 41.423,91.6 42.038,91.6 42.419,91.219 ; DD1.4@42.4,90.2 42.419,90.219 42.419,91.219 ; DD1.3@43.67,90.2 43.651,90.219 43.651,91.307 43.358,91.6 42.8,91.6 42.419,91.219
NetDD1_6: DD1.6 DD2.2 DD2.10 | length 21.6
  Top Layer w0.2: DD1.6@39.86,90.2 39.86,91.66 v1(39.88,91.68) ; v1(39.9,94.5) 39.88,94.52 39.88,96.08 DD2.10@39.86,96.1 39.86,97.683 40.277,98.1 44,98.1 46.3,100.4 46.3,102.8 45.7,103.4 44,103.4 43.689,103.089 43.689,102.019 DD2.2@43.67,102
  Bottom Layer w0.2: v1(39.88,91.68) 39.9,91.7 v1(39.9,94.5)
NetDD2_1: DD2.1 DD2.9 XP3.1 XP3.2 | length 28.7
  Top Layer w0.2: XP3.2@27.6,86.9 XP3.1@27.6,89.44 ; v1(28.583,92.724) 28.621,92.762 31.362,92.762 v1(31.4,92.8) ; v1(32.6,92.8) 36.3,92.8 38.59,95.09 DD2.9@38.59,96.1 38.59,97.488 39.702,98.6 43,98.6 44.94,100.54 DD2.1@44.94,102
  Bottom Layer w0.2: XP3.1@27.6,89.44 27.6,91.741 v1(28.583,92.724) ; v1(31.4,92.8) v1(32.6,92.8)
NetDD3_3: DD3.3 DD3.4 | length 3.7
  Top Layer w0.5: DD3.4@51.89,90.3 51.909,90.319 51.909,91.407 52.202,91.7 52.8,91.7 53.141,91.359 53.141,90.319 DD3.3@53.16,90.3
NetK1_2: K1.2 R55.2 | length 2.5
  Top Layer w1: K1.2@48.01,55.83 48.145,55.83 48.975,55 R55.2@50.2,55
NetK1_5: K1.5 R59.2 VD12.2 | length 8.2
  Top Layer w1: VD12.2@34,58.9 34.1,59 R59.2@37.2,59 37.5,59 37.5,60.6 37.81,60.91 K1.5@40.39,60.91
NetK1_8: K1.8 R63.1 | length 2.1
  Top Layer w1: R63.1@38.4,53.1 40.065,53.1 40.255,53.29 K1.8@40.39,53.29
NetK2_2: K2.2 R58.1 | length 2.4
  Top Layer w1: K2.2@47.91,40.23 47.94,40.2 R58.1@50.3,40.2
NetK2_5: K2.5 R67.2 VD13.2 | length 14.9
  Top Layer w1: R67.2@37.8,44.1 38.945,44.1 40.155,45.31 K2.5@40.29,45.31 40.386,45.214 41.486,45.214 42.49,44.21 VD13.2@42.49,35
NetK2_8: K2.8 R61.1 | length 2
  Top Layer w1: R61.1@38.3,37.7 38.6,37.7 38.61,37.69 K2.8@40.29,37.69
NetR1_2: R1.2 XP1.1 XP1.4 XP1.7 XP1.20 XP2.2 КТ1.1 | length 44.3
  Top Layer w0.2: XP1.4@2.3,41 XP1.1@4.3,43
  Top Layer w0.3: КТ1.1@1.6,54.5 R1.2@1.6,57.5 1.6,60.4 XP2.2@2.7,61.5
  Bottom Layer w0.2: КТ1.1@1.6,54.5 1.6,53.25 1.1,52.75 1.1,42.2 XP1.4@2.3,41 3.3,40 3.3,38 XP1.7@4.3,37 3.3,36 2.714,36 2.3,36 1.886,36 0.7,34.814 0.7,26.6 XP1.20@2.3,25
NetR10_2: R10.2 RP1.3 | length 2.4
  Top Layer w0.2: RP1.3@21.365,117.64 21.365,119.965 R10.2@21.4,120
NetR14_1: R14.1 R15.2 RP2.3 RP3.3 | length 11.1
  Top Layer w0.3: R15.2@6.3,126.9 R14.1@4,126.9 4,124.35 RP3.3@3.8,124.15 RP2.3@9.75,124.15
NetR16_1: R16.1 R17.2 RP2.1 RP3.1 | length 11.4
  Top Layer w0.3: R17.2@1.7,118.8 R16.1@4,118.8 3.8,119 RP3.1@3.8,121.85 RP2.1@9.75,121.85
NetR21_1: R21.1 RP2.2 | length 52.6
  Top Layer w0.5: RP2.2@13.05,123 v1(23.8,123) ; v1(26.2,120.6) 28.4,118.4 32.4,118.4 33.6,119.6 46.4,119.6 48.34,121.54 v1(50.1,123.3) ; v1(53.15,123.299) v1(57.3,123.3) ; v1(60.479,123.322) 61.678,123.322 R21.1@61.7,123.3
  Bottom Layer w0.5: v1(23.8,123) v1(26.2,120.6) ; v1@50.1,123.3 v1(53.15,123.299) ; v1(57.3,123.3) 57.311,123.311 60.468,123.311 v1(60.479,123.322)
NetR22_1: R22.1 RP3.2 | length 23
  Top Layer w0.5: RP3.2@7.1,123 10.5,123 12.1,121.4 14.7,121.4 15.1,121.8 v1(24,121.8) ; v1@25.107,120.6 26.307,121.8 R22.1@28.2,121.8
  Bottom Layer w0.5: v1(24,121.8) 25.069,120.731 25.069,120.6 v1(25.088,120.581)
NetR24_2: R24.2 R28.1 | length 3.8
  Top Layer w1: R28.1@61.4,116.9 61.7,117.2 R24.2@61.7,120.6
NetR25_2: R25.2 R29.1 | length 4.4
  Top Layer w0.5: R29.1@27.1,128 27.1,126.6 28.2,125.5 R25.2@28.2,124.1
NetR30_2: R30.2 R37.1 R38.1 VD6.3 VT1.3 КТ3.1 | length 11.6
  Top Layer w0.3: R30.2@78.3,132.6 80.5,132.6 82,131.1 82,128.6 82.9,127.7 86.174,127.7 86.35,127.876
NetR31_2: R31.2 R36.1 VD5.1 VT2.3 КТ4.1 | length 10.1
  Top Layer w0.5: VT2.3@25.05,141.3 25.6,141.3 27,139.9 КТ4.1@27,138.5 26.919,138.5 26.169,137.75 VD5.1@25.15,137.75 25.175,137.75 25.275,137.65 25.275,135.725 R36.1@25.4,135.6 R31.2@27.1,135.6
NetR36_2: R36.2 R39.1 VD5.3 VT2.1 VT2.2 VT2.5 VT2.6
NetR37_2: R37.2 VD7.2 | length 2
  Top Layer w0.3: R37.2@94,130.4 VD7.2@94,132.41
NetR44_2: R44.2 XP6.2 | length 4.2
  Top Layer w0.5: XP6.2@30.26,2.9 30.33,2.97 30.33,6.93 R44.2@30.4,7
NetR45_2: R45.2 XP6.4 | length 6.1
  Top Layer w0.5: XP6.4@35.34,2.9 35.34,5.34 37.1,7.1 R45.2@38.3,7.1
NetR46_1: R46.1 VD10.4 | length 8.3
  Top Layer w1: R46.1@74.2,58.9 76.8,58.9 77.85,57.85 VD10.4@77.85,53.65
NetR47_1: R47.1 VD10.3 | length 16.4
  Top Layer w1: R47.1@69.1,58.9 69.1,57.4 69.8,56.7 74,56.7 75.1,55.6 75.1,51.3 VD10.3@77.85,48.55
NetR61_2: R61.2 R66.1 VT3.1 | length 13.5
  Top Layer w1: VT3.1@27,39.85 30.05,42.9 32.8,42.9 35,40.7 36.2,40.7 R61.2@38.3,40.7
NetR62_1: R62.1 R65.1 VD11.3 VD12.1 VT4.3 | length 49.5
  Top Layer w2: R65.1@26.7,47.3 30.85,47.3 VT4.3@32.65,49.1 33.55,50 R62.1@36.2,50 36.66,50.46 47.94,50.46 50.4,48 50.4,45.8 53.675,42.525 53.675,40.425 VD11.3@53.7,40.4
  Bottom Layer w2: VD12.1@30.02,58.9 32.203,56.717 33.983,56.717 35.8,54.9 35.8,52.25 VT4.3@32.65,49.1
NetR62_2: R62.2 R63.2 VT4.1 | length 8.9
  Top Layer w1: VT4.1@32.65,54.1 32.9,54.1 34,53 R62.2@36.2,53 36.2,55.4 36.9,56.1 R63.2@38.4,56.1
NetR64_1: R64.1 VD11.4 VT3.2 | length 32.5
  Top Layer w2: VT3.2@29.5,37.35 R64.1@29.5,33.5 29.5,31.9 30.9,30.5 41.2,30.5 45.2,34.5 52.065,34.5 53.665,32.9 VD11.4@53.7,32.9
NetR64_2: pad.12@23.6,19.8 R64.2 R66.2 VD13.1 VT3.3
  other v1: 37.1,33.9 33.1,34.9 35.1,35.9 37.1,36.1 33.1,36.9
NetR65_2: pad.12@49.6,8.1 R65.2 VT4.2 | length 60.1
  Top Layer w2: VT4.2@30.15,51.6 28.6,51.6 27.9,52.3 R65.2@26.7,52.3 24.2,49.8 24.2,32.4 48.213,8.387 49.313,8.387 pad.12@49.6,8.1
OVLI,2: DA8.2 DD1.2 DD3.2 DD3.6 | length 82.4
  Top Layer w0.2: DA8.2@14.912,42.565 16.693,42.565 20.1,45.972 20.1,49.9 26.8,56.6 26.8,59.9 32.6,65.7 32.6,79.477 32.604,79.481 32.604,80.226 32.6,80.23 32.6,87.1 37.83,92.33 44.088,92.33 44.959,91.459 ; DD1.2@44.94,90.2 44.959,90.219 44.959,91.459 ; DD3.2@54.43,90.3 54.43,89.03 54.1,88.7 49.8,88.7 49.369,89.131 49.369,90.281 49.331,90.319 49.331,91.342 49.214,91.459 47.137,91.459 47.128,91.45 46.672,91.45 46.663,91.459 44.959,91.459
OVLI,2n: DA8.7 XP1.14 | length 15.9
  Top Layer w0.2: XP1.14@2.3,31 3.3,32 4.9,32 6.1,33.2 6.1,36.67 6.931,37.501 ; 6.931,37.505 6.876,40.891 6.876,40.976 8.465,42.565 DA8.7@9.288,42.565
S+: DA14.2 DA14.15 R18.1 | length 70.9
  Top Layer w0.2: DA14.15@41.975,73.788 DA14.2@41.975,79.212 41.975,80.175 42.4,80.6 56.3,80.6 59.55,83.85 v1(59.55,88.05) ; v1(59.624,90.783) 59.624,92.124 59.8,92.3 v1(59.8,100.6) ; v1(59.8,107.9) 59.259,108.441 59.259,123.893 59.259,124.059 61.1,125.9 61.9,126.7 R18.1@63,126.7
  Bottom Layer w0.2: v1(59.55,88.05) 59.587,88.087 59.587,90.746 v1(59.624,90.783) ; v1(59.8,100.6) v1(59.8,107.9)
S-: DA14.7 DA14.10 R19.1 | length 56.6
  Top Layer w0.2: v1(29.4,117.1) 29.416,117.084 29.416,114.92 v1(29.424,114.912) ; v1(29.4,119.5) 29.4,124.7 30.617,125.917 30.617,126.517 R19.1@30.7,126.6 ; v1(29.6,113.4) 29.7,113.4 35.6,107.5 v1(35.6,98.2) ; v1(35.616,83.683) 34.9,82.967 34.9,81.1 35.63,80.37 35.63,79.217 DA14.7@35.625,79.212 DA14.10@35.625,73.788
  Bottom Layer w0.2: v1(29.4,117.1) 29.4,119.347 29.477,119.423 v1(29.4,119.5) ; v1(29.424,114.912) 29.424,113.684 29.6,113.508 v1(29.6,113.4) ; v1(35.6,98.2) 35.616,98.184 v1(35.616,83.683)
pads on no net: DA2.6 DA2.10 DA2.11 DA2.14 DA3.6 DA3.10 DA3.11 DA3.14 DA5.6 DA5.10 DA5.11 DA5.14 DA7.1 DA7.3 DA7.5 DA7.7 DA7.8 DA10.7 DA17.1 DA17.2 DA17.3 DA17.6 DA17.7 DA17.8 DA21.5 DA21.6 DA22.5 DA22.6 DD1. DD1.8 DD1.9 DD1.10 DD1.11 DD1.12 DD1.13 DD2. DD2.3 DD2.11 DD3. DD3.8 DD3.9 DD3.10 DD3.11 DD3.12 DD3.13 Designator17.1 Designator18.1 Designator19.1 Designator20.1 Designator21.1 Designator22.1 K1.1 K1.4 K1.6 K1.7 K2.1 K2.4 K2.6 K2.7 R68.1 R68.2 R69.1 R69.2 VD5.2 VD6.2 VD8.2 VD9.2 XP1.18 XP6.1 XP6.5

## Polygon pours and split planes (outlines as drawn)
GND on Top Layer "NONET_L01_P-001" (solid, pour order 23): 8.4,97.2 3.7,97.2 2.5,98.4 2.5,116.2 4.9,116.2 6.6,114.5 7.6,114.5 8.1,114 9.8,114 10.3,113.5 10.3,109.7 8.4,107.8 8.4,103.3 6.925,103.3 6.15,102.525 6.15,100.45 6.9,99.7 7.9,99.7 8.4,99.2
NetC23_2 on Top Layer "NONET_L01_P-001" (solid, pour order 8): 39.7,126.4 39.7,124.7 38.2,123.2 38.2,120.95 32.8,120.95 32.8,120.3 32.2,119.7 30.6,119.7 30.6,123.8 33.2,126.4
GND on Top Layer "NONET_L01_P-001" (solid, pour order 22): 98.2,103.5 92.7,103.5 88.1,108.1 80,108.1 79,109.1 79,112 77.3,113.7 77.3,119.6 96.2,119.6 98.2,117.6
GND on Top Layer "NONET_L01_P-001" (solid, pour order 21): 30.9,117.5 45.5,117.5 45.5,118.8 50.7,118.8 50.7,112.9 46.1,112.9 43.3,110.1 36.2,110.1 30.9,115.4
GND on Top Layer "NONET_L01_P-001" (solid, pour order 19): 54.3,79.2 56.9,79.2 61.5,83.8 73.4,83.8 73.4,80.5 64.4,80.5 62.1,78.2 62.1,76.5 57.7,72.1 56.3,72.1 54.3,74.1
GND on Top Layer "NONET_L01_P-001" (solid, pour order 17): 38.2,88.4 38.2,86 38.7,85.5 53.2,85.5 53.6,85.9 53.6,86.7 51.9,88.4 50,88.4
NetR30_2 on Top Layer "NONET_L01_P-001" (solid, pour order 12): 86.4,130.2 92.3,130.2 92.4,130.1 92.4,129 92.9,128.5 94.7,128.5 95.4,127.8 95.4,126.7 94.9,126.2 87,126.2 86.4,126.8
+70 on Top Layer "NONET_L01_P-001" (solid, pour order 11): 85.367,128.675 85.367,138.133 82.3,141.2 80,141.2 79.2,140.4 79.2,137.2 83.6,132.8 83.6,128.675
NetC22_2 on Top Layer "NONET_L01_P-001" (solid, pour order 10): 72.4,124.353 72.4,126.5 72.2,126.7 64.6,126.7 64.3,126.4 64.3,125.1 64,124.8 64,119.2 64.5,118.7 64.5,117.3 66.1,115.7 67.7,115.7 68.05,116.05 68.05,123.35 69.171,124.353
NetC24_1 on Top Layer "NONET_L01_P-001" (solid, pour order 9): 71.2,130.9 71.2,128.3 60.4,128.3 60.4,130.4 61,131 61,132.5 61.4,132.9 63,132.9 65,130.9
NetC25_1 on Top Layer "NONET_L01_P-001" (solid, pour order 7): 38.6,128.4 29.6,128.4 29.6,132.4 38.6,132.4
NetR64_2 on Top Layer "NONET_L01_P-001" (solid, pour order 5): 30.8,41 30.8,38.6 32.3,37.1 32.3,33.6 33.6,32.3 38.4,32.3 39.55,33.45 39.55,35.75 39,36.3 37.4,36.3 36.9,36.8 36.9,38.5 36.8,38.6 35.2,38.6 32.8,41 32.1,41
GND on Top Layer "NONET_L01_P-001" (solid, pour order 4): 16.9,12.2 16.9,1.6 21.7,1.6 21.7,12.2
NetR36_2 on Top Layer "NONET_L01_P-001" (solid, pour order 3): 23.1,134.3 23.1,137.5 23.725,138.125 23.725,139.925 24.1,140.3 24.1,144.6 24.5,145 27.9,145 27.9,146.6 21.3,146.6 21.3,134.3
-70 on Top Layer "NONET_L01_P-001" (solid, pour order 2): 34.7,138.9 33.5,138.9 32.2,137.6 30.1,137.6 29.4,138.3 29.4,143.3 30.8,144.7 33,144.7 33.2,144.5 33.2,141.7 34.7,140.2
GND on Bottom Layer "NONET_L01_P-001" (solid, remove dead copper, pour order 15): 2.521,98.189 2.521,126.689 19.821,143.989 56.621,143.989 88.021,143.989 98.221,137.989 98.221,102.189 66.821,70.789 58.421,70.789 51.121,63.489 35.421,63.489 27.021,71.889 27.021,78.989 21.021,84.989 21.021,93.489 19.121,95.389 5.321,95.389
GND on Bottom Layer "NONET_L01_P-001" (solid, pour order 16): 2.5,98.5 2.5,88.9 8.7,82.7 13.1,82.7 14.5,81.3 14.5,70.7 17.1,68.1 21.9,68.1 25.65,64.35 25.65,58.75 18.4,51.5 18.4,11.3 18.6,11.1 19.6,11.1 20.6,12.1 20.6,50.3 28,57.7 28,65.7 23.26,70.44 19.56,70.44 17.708,72.292 17.708,82.092 14.8,85 10.8,85 5.241,90.559 5.241,98.462
GND on Bottom Layer "NONET_L01_P-001" (solid, pour order 13): 18.1,12.3 16.9,11.1 16.9,1.3 17.9,0.3 44.8,0.3 46.6,2.1 46.6,6.6 45.6,7.6 42.5,7.6 39.4,4.5 39.4,2.2 38.7,1.5 22.1,1.5 21.7,1.9 21.7,11.2 20.6,12.3
NetR64_2 on Bottom Layer "NONET_L01_P-001" (solid, pour order 6): 32.5,37.3 32.5,31.9 21.5,20.9 21.5,18.7 22.7,17.5 25.5,17.5 39.55,31.55 39.55,35.75 39,36.3 37.7,36.3 36.7,37.3

## Keep-outs
Keep-Out Layer:
  circle w0.05: c100,69 r0.025
  circle w0.05: c0,75 r0.025
  circle w0.05: c88,150 r0.025
  circle w0.05: c100,138 r0.025
  lines w0.1: 0,0 0,12 12,12 12,0 0,0 ; 0,69 0,81 12,81 12,69 0,69 ; 0,138 0,150 12,150 12,138 0,138 ; 88,0 100,0 100,12 88,12 88,0 ; 88,69 88,81 100,81 100,69 88,69 ; 88,138 100,138 100,150 88,150 88,138

## Other copper
Top Layer:
  rectangle net +15: 22.58,6.2 24.8,12.32
  rectangle net NetC16_2: 11.1,110.9 11.3,111.5
  rectangle net -15: 13.7,6.5 15.551,11.2
  rectangle net +100: 72.2,64.5 76.2,66.3
  rectangle net -100: 67.1,64.5 71.1,66.3
Bottom Layer:
  rectangle net GND: 2.6,100.7 5.8,103.7
  pour cut-out: 61.25,86.895 61.25,83 59.7,83 59.7,86.8
  pour cut-out: 39.883,105.424 42.7,105.424 42.7,104.7 40.004,104.7
  pour cut-out: 47.824,77.717 47.389,76.12 46.9,77.3
  pour cut-out: 20.924,105.383 22.2,104.107 22.2,103.399 21.001,103.399 21,103.4
  pour cut-out: 30.9,94.299 30.9,92.701 32.801,92.701 33.1,93 33.1,94.2
  pour cut-out: 91.3,106.7 91.3,103.005 98.3,103.005 98.3,98.3 87.2,98.3 87.2,106.7
  pour cut-out: 31.925,126.485 31.925,124.535 35.975,124.535 35.975,126.485
  pour cut-out: 45.14,126.45 37.66,126.45 37.66,124.05 45.14,124.05 45.14,125.092
  pour cut-out: 31.6,130.75 31.6,123.6 47.1,123.6 47.1,131.1 42.828,131.1 42.828,130.75 38.79,130.75
  pour cut-out: 69.8,131.3 63.8,131.3 63.8,124 69.8,124
  pour cut-out: 37.675,98.2 35.883,98.624 35.922,97.3 37.576,97.3
  pour cut-out: 2.5,116 6.341,116 6.341,117.7 2.5,117.7
  pour cut-out: 29,90.7 26.2,90.7 26.2,83 29,83
  pour cut-out: 27.6,112.9 27.6,105.14 30.4,105.14 30.4,112.9
  pour cut-out: 14.7,106.899 14.7,103.5 15,103.2 16.3,104.5 16.3,105.4
  pour cut-out: 15.4,104.1 15.7,103.8 15.7,101.4 14.9,100.6 9.57,100.6 8.9,101.27 8.9,104.1
  pour cut-out: 37.15,86.601 37.15,81.95 36.8,81.6 35.4,83 35.4,84.2
  pour cut-out: 31.799,81.4 25.7,81.4 25.3,81 26.7,79.6 31.7,79.6 31.8,79.5
  pour cut-out: 37.783,75.724 38.5,75.007 38.5,70.8 36.7,69 36.7,63.5 35.3,63.5 34.2,64.6 34.6,65 34.6,74.7
  pour cut-out: 81.148,141.056 73.256,141.056 68.99,136.79 68.99,124.01 69,124 78.3,124 80.7,121.6 84.3,121.6 85.1,122.4

## Silkscreen, mask and mechanical layers (free items; w line width, h text height)
Top Overlay:
  region: 82.1,69.3 80.3,68.7 79.1,68.5 77.3,68.7 75.5,69.3
  region: 61.3,80.7 63.1,81.3 64.3,81.5 66.1,81.3 67.9,80.7
  lines w0.15: 20.973,33.58 26.18,33.58 ; 37.6,33.6 51.3,33.6 ; 57.28,33.58 57.727,33.58
  lines w0.2: 33.5,140.8 37.3,140.8
  text "6" at 40.8,138.9 h2.5
  text "5" at 43.6,138.9 h2.5
  text "7" at 28.9,138.7 h2.5
  text "3" at 63.6,138.7 h2.5
  text "2" at 75.6,138.7 h2.5
  text "1" at 79,138.7 h2.5
  text "4" at 86.902,90.8 h2.5
  text "8" at 59.407,54.495 h2
  text "9" at 59.531,46.932 h2
  text "10" at 58.906,39.329 h2
  text "11" at 59.15,31.835 h2
  text "15" at 54.2,27.2 h2
  text "12" at 58.906,24.48 h2
  text "13" at 23,16.9 h2
  text "14" at 46.4,7.6 h2
  text "16" at 77,7.4 h2
Top Paste:
  lines w1: 26.7,47.3 31,47.3 32.8,49.1 34,50.3 48,50.3 50.4,47.9 50.4,45.8 53.7,42.5 53.7,40.4 ; 29.518,37.35 29.518,33.453 ; 30.15,51.6 28.6,51.6 27.9,52.3 26.6,52.3 24.2,49.9 24.2,32.4 48.213,8.387 ; 33.4,38.5 33.4,37 35.4,35 38.51,35 ; 39.6,47.9 46.672,47.9 ; 53.7,32.9 52.1,34.5 45.518,34.5 41.518,30.5 30.818,30.5 29.518,31.8 29.518,33.453 ; 53.7,47.9 57.6,44 57.6,37.4 62.5,32.5 ; 53.7,57.9 59.2,52.4 59.2,50.8 62.5,47.5 ; 29.518,33.453 29.518,33.453
Bottom Paste:
  lines w1: 24,19.9 34.5,30.4 34.5,33.5 ; 41.4,125.25 41.4,121.9 44.3,119 44.3,103.7 51.3,96.7 51.3,90.679 64.479,77.5 ; 44.464,47.6 46.9,47.6 61,61.7 72.8,61.7 74.2,63.1 74.2,68.3 ; 55,25.4 72.3,8.1 80.4,8.1 86.2,13.9 ; 72.765,129.785 72.765,132.365 73.7,133.3 80.1,133.3 81.9,131.5 81.9,80.6 78.8,77.5 ; 81.339,139.606 81.339,136.961 86.2,132.1 86.2,14.3
Top Solder:
  lines w1: 26.7,47.3 31,47.3 32.8,49.1 34,50.3 48,50.3 50.4,47.9 50.4,45.8 53.7,42.5 53.7,40.4 ; 29.5,37.35 29.5,33.453 29.5,33.453 29.5,31.8 30.8,30.5 41.5,30.5 45.5,34.5 52.082,34.5 53.682,32.9 ; 30.15,51.6 28.6,51.6 27.9,52.3 26.6,52.3 24.2,49.9 24.2,32.4 48.213,8.387 ; 33.4,38.5 33.4,37 35.4,35 38.51,35 ; 39.5,47.6 46.572,47.6 ; 53.7,47.9 57.6,44 57.6,37.4 62.5,32.5 ; 53.7,57.9 59.2,52.4 59.2,50.8 62.5,47.5
Bottom Solder:
  lines w1: 24,19.9 34.5,30.4 34.5,33.5 ; 41.4,125.25 41.4,121.9 44.3,119 44.3,103.7 51.3,96.7 51.3,90.679 64.479,77.5 ; 44.464,47.6 47.4,47.6 61.5,61.7 72.8,61.7 74.2,63.1 74.2,68.3 ; 55,25.4 72.3,8.1 80.4,8.1 86.2,13.9 86.2,14.3 86.2,132.2 81.339,137.061 81.339,139.606 ; 72.765,129.785 72.765,132.365 73.7,133.3 80.1,133.3 81.9,131.5 81.9,80.6 78.8,77.5
Mechanical 1:
  circle w0.1: c95,5 r1.7
  circle w0.05: c90,55 r0.025
  circle w0.05: c90,55 r0.025
  circle w0.1: c96.736,91.568 r1.5
  circle w0.1: c90.585,91.568 r0.75
  circle w0.1: c81.339,145.99 r1.5
  circle w0.1: c66.338,145.973 r1.5
  circle w0.1: c73.838,145.99 r1.5
  circle w0.1: c46.339,146.066 r1.5
  circle w0.1: c81.339,139.606 r0.75
  circle w0.05: c96.264,146.137 r0.025
  circle w0.05: c12,150 r0.025
  circle w0.05: c100,81 r0.025
  circle w0.05: c0,145 r0.025
  circle w0.05: c5,0 r0.025
  circle w0.1: c5,145 r1.7
  circle w0.1: c5,75 r1.7
  circle w0.1: c5,5 r1.7
  circle w0.1: c95,5 r1.7
  circle w0.1: c95,75 r1.7
  circle w0.1: c95,145 r1.7
  circle w0.1: c31.338,139.606 r0.75
  circle w0.1: c46.339,139.606 r0.75
  circle w0.1: c38.838,139.606 r0.75
  circle w0.1: c31.338,146.05 r1.5
  circle w0.1: c38.838,146.066 r1.5
  circle w0.1: c73.839,139.606 r0.75
  circle w0.1: c66.338,139.606 r0.75
  circle w0.1: c62.5,25 r0.9
  circle w0.1: c62.5,32.5 r0.9
  circle w0.1: c62.5,40 r0.9
  circle w0.1: c62.5,47.5 r0.9
  circle w0.1: c62.5,55 r0.9
  circle w0.1: c80,65 r0.9
  circle w0.1: c90,55 r0.9
  circle w0.1: c90,25 r0.9
  circle w0.1: c80,15 r0.9
  region: 3.292,145 3.3,145
  lines w0.1: 30.979,147.506 cw(c31.338,146.05) 32.238,147.25 ; 65.979,144.517 ccw(c66.338,145.973) 67.238,144.773 ; 65.979,147.43 cw(c66.338,145.973) 67.238,147.173 ; 72.938,144.79 ccw(c73.838,145.99) 72.938,147.19 ; 80.439,144.79 ccw(c81.339,145.99) 80.439,147.19 ; 89.75,25 90.25,25 ; 89.75,55 90.25,55 ; 95.536,92.468 ccw(c96.736,91.568) 97.936,92.468
Board:
  the board outline again, w0.1
Top Assembly:
  circle w0.5: c52.6,61 r0.15
  circle w0.5: c71.2,55.2 r0.15
  lines w0.1: 79.25,14.5 79.25,15 89.25,15 ccw(c89.25,15.5) 89.75,15.5 89.75,64.5 ccw(c89.25,64.5) 89.25,65 79.25,65 79.25,65.5 89.25,65.5 cw(c89.25,64.5) 90.25,64.5 90.25,15.5 cw(c89.25,15.5) 89.25,14.5 79.25,14.5
  text "6" at 40.8,138.9 h2.5
  text "5" at 43.6,138.9 h2.5
  text "7" at 28.9,138.7 h2.5
  text "3" at 63.6,138.7 h2.5
  text "2" at 75.6,138.7 h2.5
  text "1" at 79,138.7 h2.5
  text "4" at 86.902,90.8 h2.5
  text "+" at 84.4,80.622 h2 r180
  text "-" at 59.05,79.466 h2
  text "-" at 84.05,70.234 h2 r180
  text "+" at 58.7,69.078 h2
  text "8" at 59.407,54.495 h2
  text "9" at 59.531,46.932 h2
  text "10" at 58.906,39.329 h2
  text "11" at 59.15,31.835 h2
  text "15" at 54.2,27.2 h2
  text "12" at 58.906,24.48 h2
  text "13" at 23,16.9 h2
  text "14" at 46.4,7.6 h2
  text "16" at 77,7.4 h2
  text "-" at 35.6,7.268 h2 r180
  text "+" at 32.5,7.222 h2 r180
  text "+" at 17.6,0.178 h2
  text "+" at 23.3,0.178 h2
  text "-" at 14.5,0.132 h2
  text "-" at 20.2,0.132 h2
Mechanical 13:
  lines w0.15: 2.5,5 7.5,5 ; 2.5,75 7.5,75 ; 2.5,145 7.5,145 ; 5,2.5 5,7.5 ; 5,72.5 5,77.5 ; 5,142.5 5,147.5 ; 28.838,139.606 33.838,139.606 ; 28.838,146.05 33.838,146.05 ; 31.338,137.106 31.338,142.106 ; 31.338,143.55 31.338,148.55 ; 36.338,139.606 41.338,139.606 ; 36.338,146.066 41.338,146.066 ; 38.838,143.566 38.838,148.566 ; 38.838,137.106 38.838,142.106 ; 43.839,139.606 48.839,139.606 ; 43.839,146.066 48.839,146.066 ; 46.339,137.106 46.339,142.106 ; 46.339,143.566 46.339,148.566 ; 54.3,75 95,75 ; 60,25 65,25 ; 60,32.5 65,32.5 ; 60,40 65,40 ; 60,47.5 65,47.5 ; 60,55 65,55 ; 62.5,22.5 62.5,27.5 ; 62.5,30 62.5,35 ; 62.5,37.5 62.5,42.5 ; 62.5,45 62.5,50 ; 62.5,52.5 62.5,57.5 ; 63.838,139.606 68.838,139.606 ; 63.838,145.973 68.838,145.973 ; 66.338,137.106 66.338,142.106 ; 66.338,143.473 66.338,148.473 ; 71.339,139.606 76.339,139.606 ; 71.338,145.99 76.338,145.99 ; 73.838,143.49 73.838,148.49 ; 73.839,137.106 73.839,142.106 ; 77.5,15 82.5,15 ; 77.5,65 82.5,65 ; 78.839,139.606 83.839,139.606 ; 78.839,145.99 83.839,145.99 ; 80,12.5 80,17.5 ; 80,62.5 80,67.5 ; 81.339,137.106 81.339,142.106 ; 81.339,143.49 81.339,148.49 ; 87.475,55 92.475,55 ; 87.5,25 92.5,25 ; 88.085,91.568 93.085,91.568 ; 89.975,52.5 89.975,57.5 ; 90,22.5 90,27.5 ; 90.585,89.068 90.585,94.068 ; 92.5,5 97.5,5 ; 92.5,75 97.5,75 ; 92.5,145 97.5,145 ; 94.236,91.568 99.236,91.568 ; 95,2.5 95,7.5 ; 95,72.5 95,77.5 ; 95,142.5 95,147.5 ; 96.736,89.068 96.736,94.068

## Text inside footprints (layer, text, board x,y; h text height)
C38: Top Overlay "+" at 22.54,4.347 h1.5
C39: Top Overlay "+" at 33.297,8.297 h1.5 r180
C40: Top Overlay "+" at 17.07,4.426 h1.5
C41: Top Overlay "+" at 78.1,80.4 h2 r270
C42: Top Overlay "+" at 65.2,69.7 h2 r90